# EAGLE board PCB v10 (EAGLE 9.7.0)
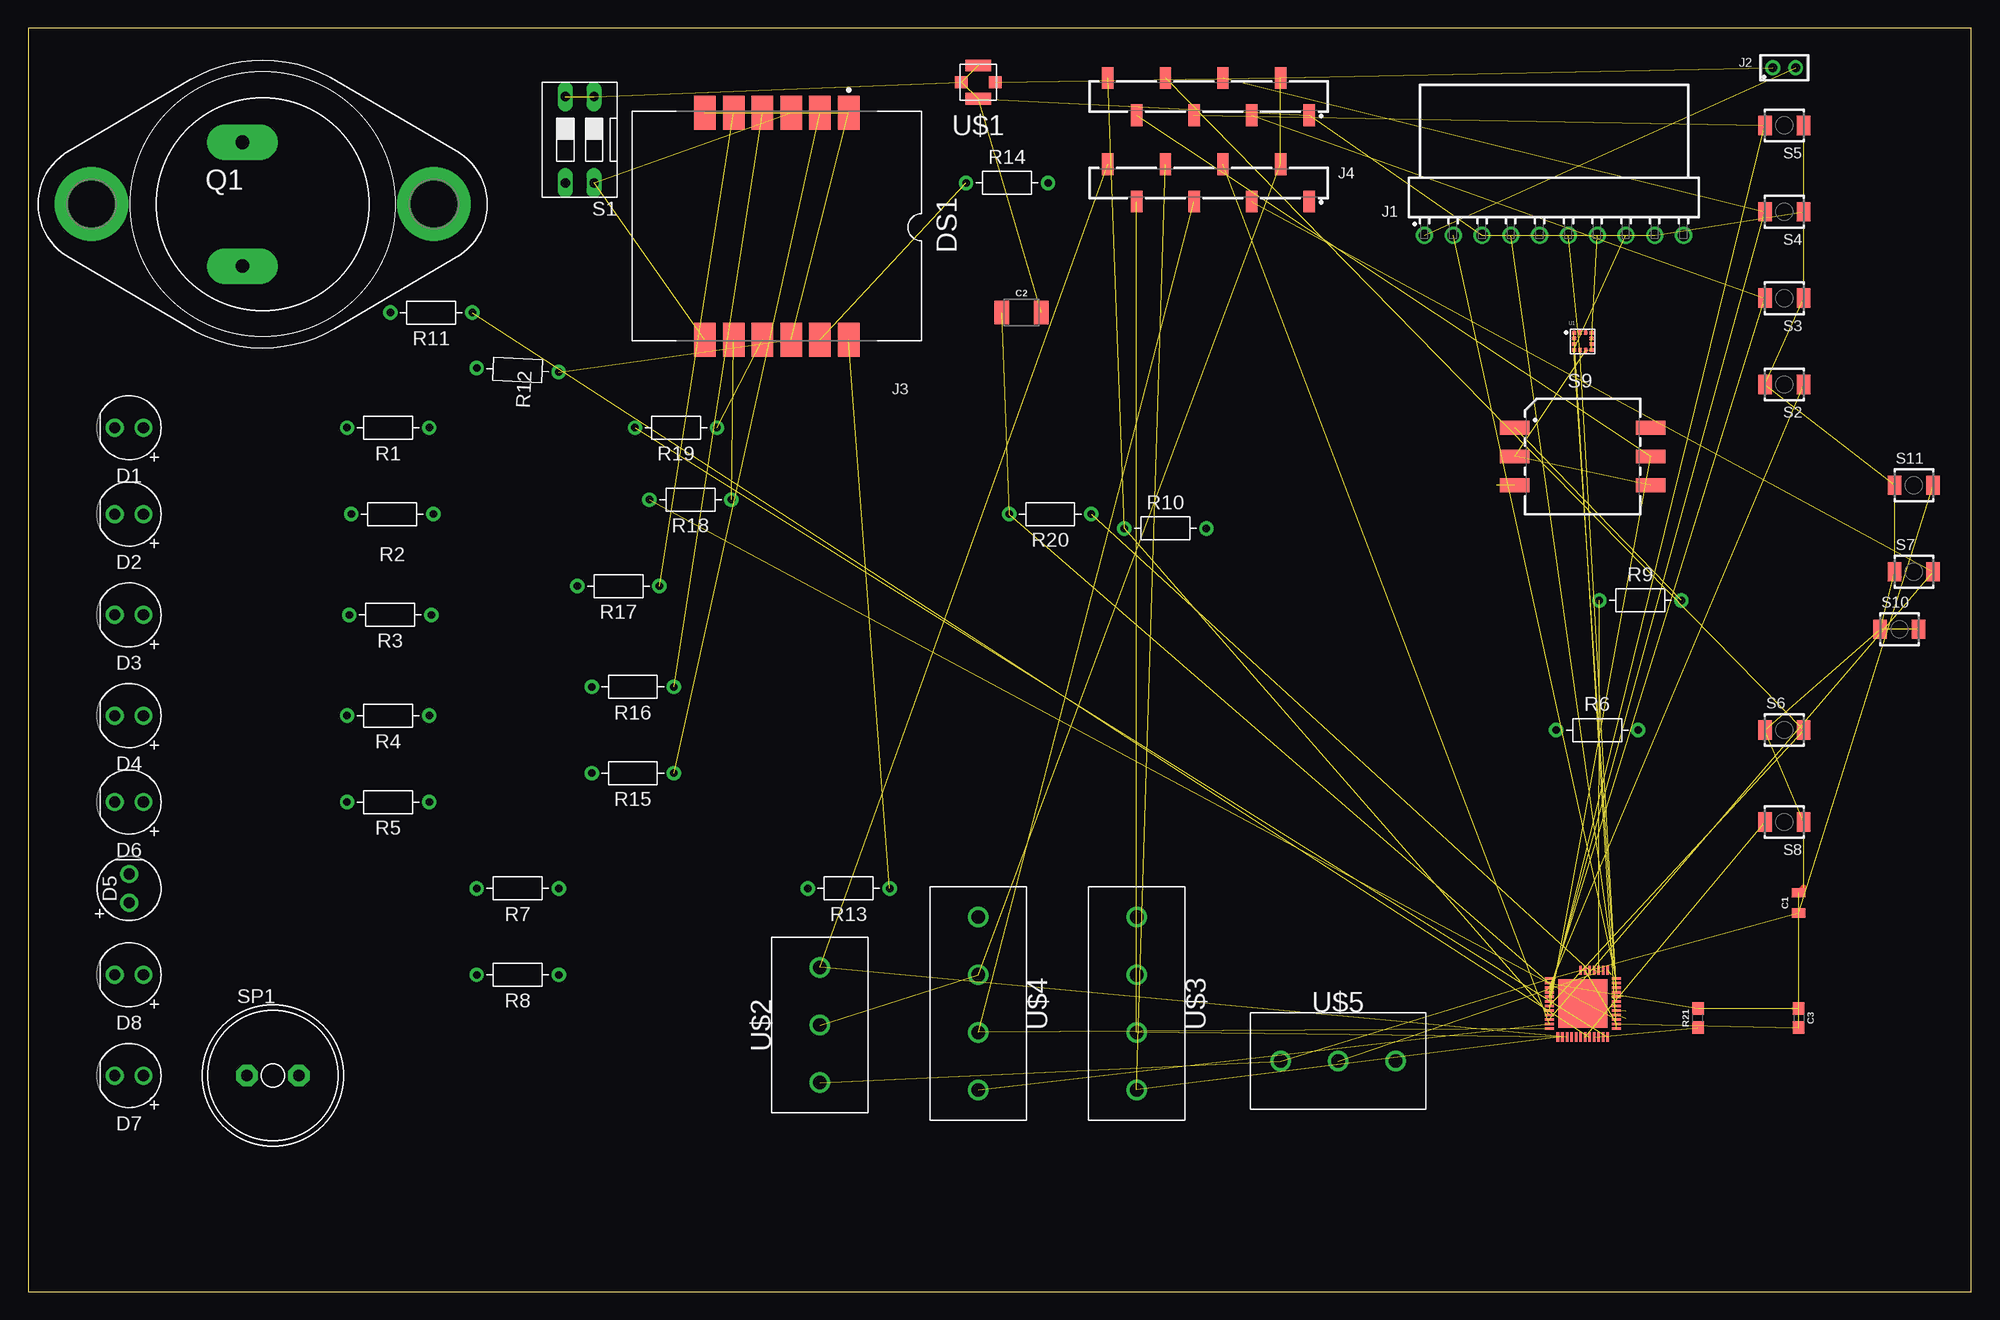
[diagram p0: board, top side]
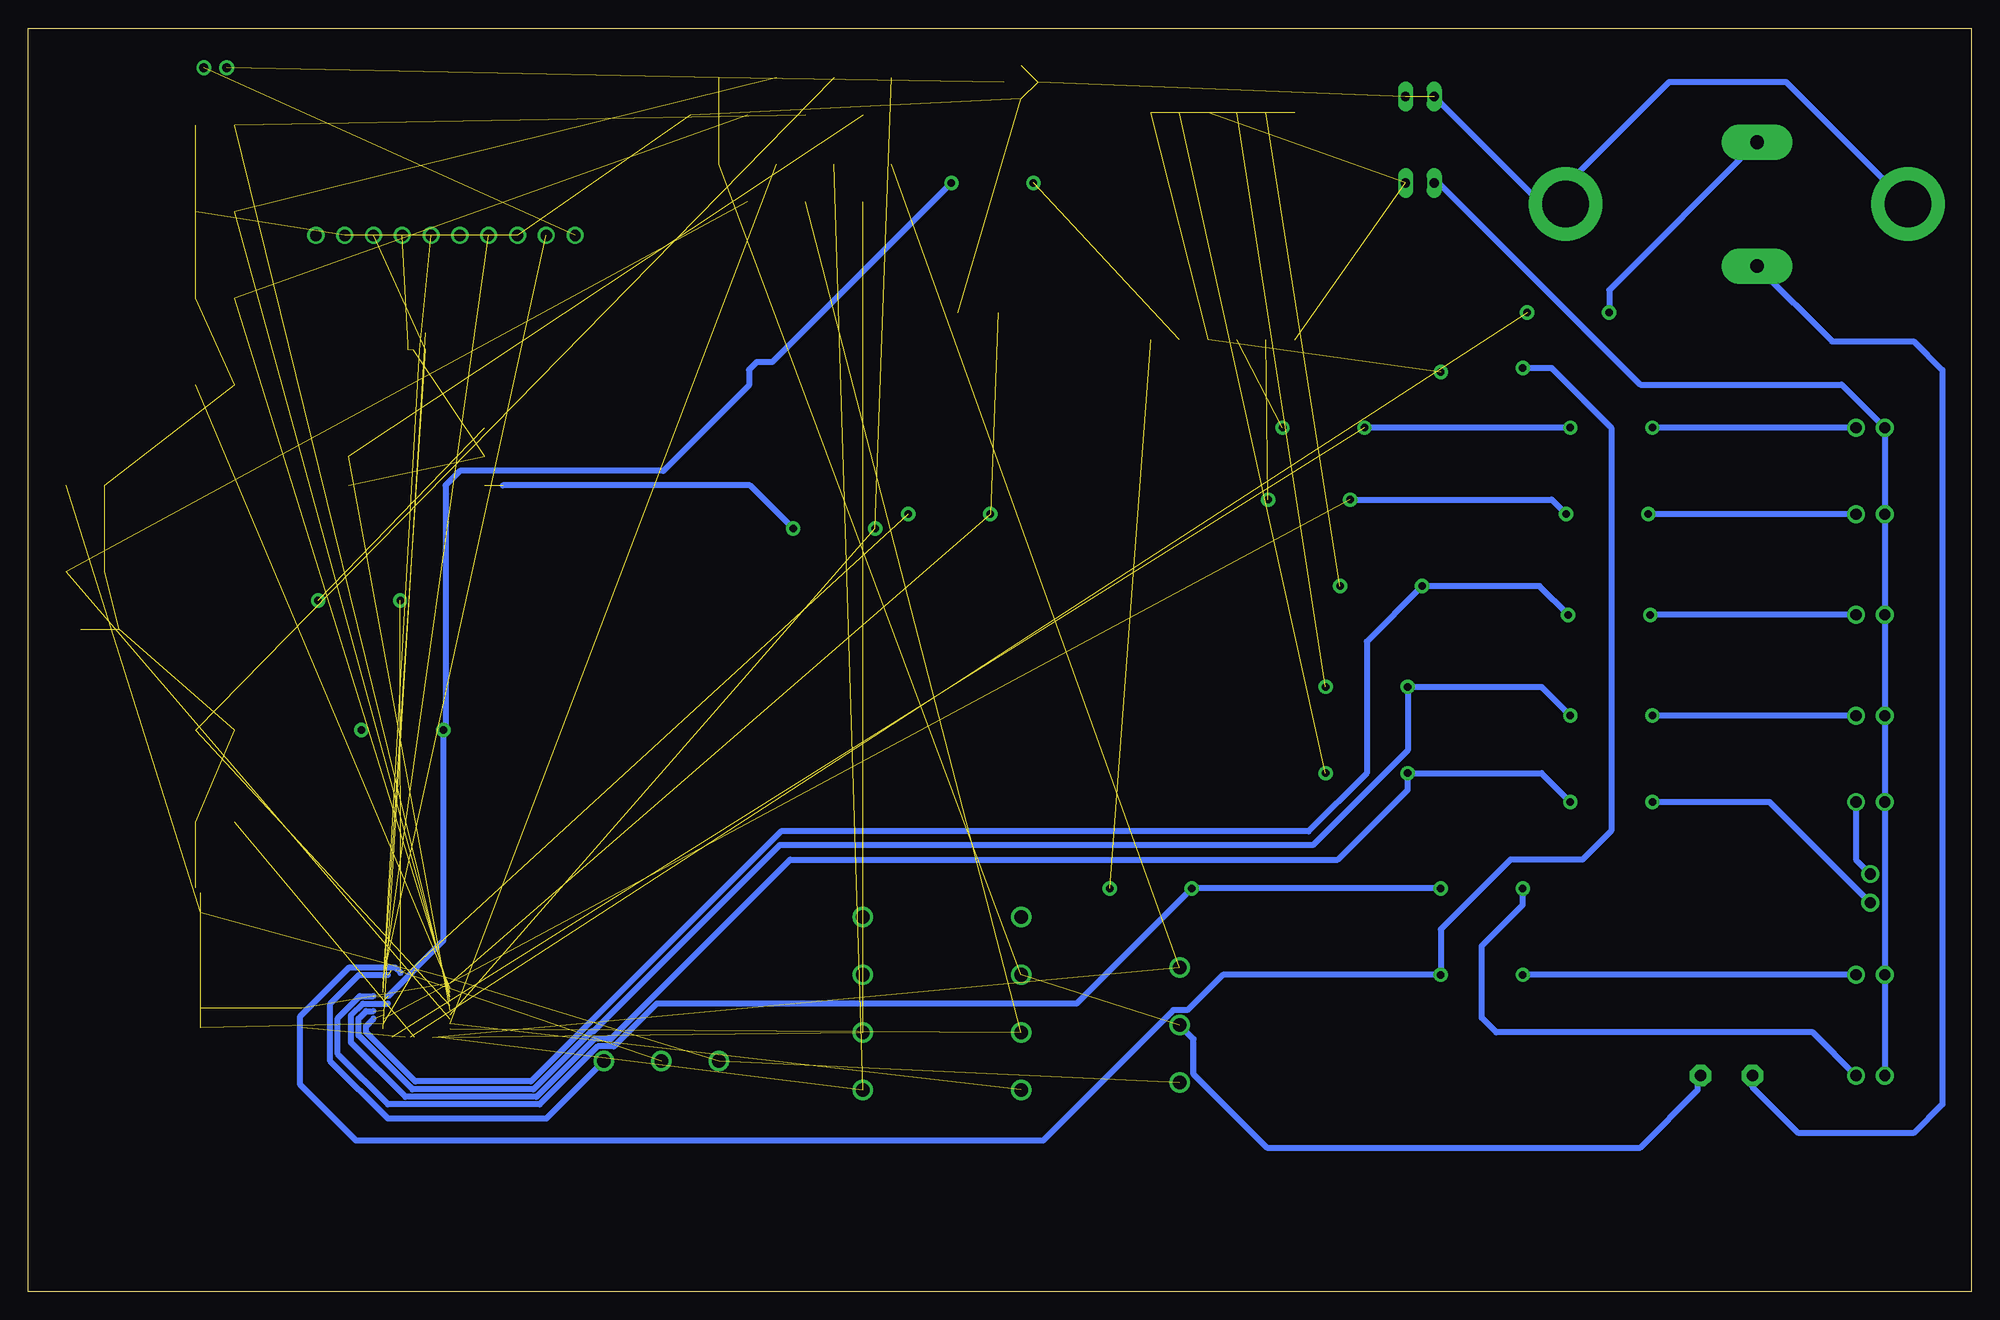
[diagram p1: board, bottom side, seen from below]

Size 171.43 x 111.43 mm. Coordinates in mm from the lower left corner, seen from the top.
Outline: 0,0 171.43,0 171.43,111.43 0,111.43 0,0
Copper layers (1*16): Top / Bottom
Stack-up Default Layer Stack: Top User Defined 0.035mm / Dielectric-1 User Defined 1.5mm / Bottom User Defined 0.035mm
Design rules "default": minimum track width 6mil, minimum drill 0.35mm, track to track 6mil, track to pad 6mil, pad to pad 6mil, via to via 6mil, smd to smd 6mil, copper to edge 40mil, drill to drill 6mil, minimum pad ring 10mil, minimum via ring 8mil, stop-mask expansion 4mil, vias tented up to drill 0mil, thermal gap 10mil

## Footprints (pad centres in the part's own frame; a part is rotated, then mirrored left to right if it is on the bottom)
0805 = smd 0.8 x 1.2: 1 -0.9,0; 2 0.9,0
1210 = smd 1.27 x 2.06: 1 -1.755,0; 2 1.755,0
0603 = smd 1.1 x 1: 1 -0.85,0; 2 0.85,0
LEDRD254W60D565H860B_G = drill 0.981 pad 1.581: 1 -1.27,0; 2 1.27,0
ACDA56-51SURKWA = smd 3 x 1.9: 1 -10,6.35; 2 -10,3.81; 3 -10,1.27; 4 -10,-1.27; 5 -10,-3.81; 6 -10,-6.35; 7 10,-6.35; 8 10,-3.81; 9 10,-1.27; 10 10,1.27; 11 10,3.81; 12 10,6.35
61901019521 = drill 1: 1 11.43,3.35; 2 8.89,3.35; 3 6.35,3.35; 4 3.81,3.35; 5 1.27,3.35; 6 -1.27,3.35; 7 -3.81,3.35; 8 -6.35,3.35; 9 -8.89,3.35; 10 -11.43,3.35
62000211121 = drill 0.8: 1 -1,0; 2 1,0
61000811921 = smd 1 x 1.91: 1 8.89,-1.645; 2 6.35,1.645; 3 3.81,-1.645; 4 1.27,1.645; 5 -1.27,-1.645; 6 -3.81,1.645; 7 -6.35,-1.645; 8 -8.89,1.645
TO3 = drill 1.194 pad 3.15 long: B -1.778,5.461; E -1.778,-5.461 | drill 4.115 pad 6.477: C 15.113,0; C/ -15.113,0
RESAD724W46L381D178B = drill 0.66 pad 1.26: 1 -3.62,0; 2 3.62,0
DS-02 = drill 0.813 long: 1 -1.27,-3.81; 2 1.27,-3.81; 3 1.27,3.81; 4 -1.27,3.81
SWITCH-OMRON_B3U-1000P = smd 1.2 x 1.7: 1 -1.7,0; 2 1.7,0
42852142091X_10POS = smd 2.6 x 1.2: 1 -6,2.54; 2 6,-2.54; 4 -6,-2.54; 8 6,2.54; C1 -6,0; C2 6,0
AL11P = drill 1.016 pad 1.905 octagon: + 2.286,0; - -2.286,0
LGA-12 = smd 0.42 x 0.35: 1 -0.775,0.75; 2 -0.775,0.25; 3 -0.775,-0.25; 4 -0.775,-0.75; 7 0.775,-0.75; 8 0.775,-0.25; 9 0.775,0.25; 10 0.775,0.75 | smd 0.35 x 0.42: 5 -0.25,-0.775; 6 0.25,-0.775; 12 -0.25,0.775 | smd 0.35 x 0.39: 11 0.25,0.775
QFN48-0.4MM = smd 0.8 x 0.23: 1 -2.95,2.2; 2 -2.95,1.8; 3 -2.95,1.4; 4 -2.95,1; 5 -2.95,0.6; 6 -2.95,0.2; 7 -2.95,-0.2; 8 -2.95,-0.6; 9 -2.95,-1; 10 -2.95,-1.4; 11 -2.95,-1.8; 12 -2.95,-2.2; 25 2.95,-2.2; 26 2.95,-1.8; 27 2.95,-1.4; 28 2.95,-1; 29 2.95,-0.6; 30 2.95,-0.2; 31 2.95,0.2; 32 2.95,0.6; 33 2.95,1; 34 2.95,1.4; 35 2.95,1.8; 36 2.95,2.2 | smd 0.23 x 0.8: 13 -2.2,-2.95; 14 -1.8,-2.95; 15 -1.4,-2.95; 16 -1,-2.95; 17 -0.6,-2.95; 18 -0.2,-2.95; 19 0.2,-2.95; 20 0.6,-2.95; 21 1,-2.95; 22 1.4,-2.95; 23 1.8,-2.95; 24 2.2,-2.95; 37 2.2,2.95; 38 1.8,2.95; 39 1.4,2.95; 40 1,2.95; 41 0.6,2.95; 42 0.2,2.95; 43 -0.2,2.95 | smd 4.3 x 4.3: EP 0,0
A-1JB = smd 1.1 x 1.05: 1 1.5,0; 2_1 -1.5,0 | smd 2.25 x 1.05: 2_0 0,1.475; 2_2 0,-1.475
TERMBLK_508-3N = drill 1.2: 1 0,0; 2 5.08,0; 3 10.16,0
TERMBLK_508-4N = drill 1.2: 1 0,0; 2 5.08,0; 3 10.16,0; 4 15.24,0

## Placement (x,y rotation side)
C1  1.0uF  [0805]  156.21,34.29 90 top
C2  22uF  [1210]  87.63,86.36 0 top
C3  0.1uF  [0603]  156.21,24.13 270 top
D1  [LEDRD254W60D565H860B_G]  8.89,76.2 180 top
D2  [LEDRD254W60D565H860B_G]  8.89,68.58 180 top
D3  [LEDRD254W60D565H860B_G]  8.89,59.69 180 top
D4  [LEDRD254W60D565H860B_G]  8.89,50.8 180 top
D5  [LEDRD254W60D565H860B_G]  8.89,35.56 90 top
D6  [LEDRD254W60D565H860B_G]  8.89,43.18 180 top
D7  [LEDRD254W60D565H860B_G]  8.89,19.05 180 top
D8  [LEDRD254W60D565H860B_G]  8.89,27.94 180 top
DS1  ACDA56-51SUR  [ACDA56-51SURKWA]  66.04,93.98 270 top
J1  61901019521  [61901019521]  134.62,96.52 180 top
J2  62000211121  [62000211121]  154.94,107.95 0 top
J3  61000811921  [61000811921]  104.14,105.41 0 top
J4  61000811921  [61000811921]  104.14,97.79 0 top
Q1  BU205  [TO3]  20.68,95.92 0 top
R1  1K  [RESAD724W46L381D178B]  31.75,76.2 180 top
R2  1K  [RESAD724W46L381D178B]  32.11,68.58 180 top
R3  1K  [RESAD724W46L381D178B]  31.94,59.69 180 top
R4  1K  [RESAD724W46L381D178B]  31.75,50.8 180 top
R5  1K  [RESAD724W46L381D178B]  31.75,43.18 180 top
R6  1K  [RESAD724W46L381D178B]  138.43,49.53 0 top
R7  1K  [RESAD724W46L381D178B]  43.18,35.56 180 top
R8  1K  [RESAD724W46L381D178B]  43.18,27.94 180 top
R9  1K  [RESAD724W46L381D178B]  142.24,60.96 0 top
R10  1K  [RESAD724W46L381D178B]  100.33,67.31 0 top
R11  1K  [RESAD724W46L381D178B]  35.56,86.36 180 top
R12  1K  [RESAD724W46L381D178B]  43.18,81.28 177.2 top
R13  1K  [RESAD724W46L381D178B]  72.39,35.56 180 top
R14  1K  [RESAD724W46L381D178B]  86.36,97.79 0 top
R15  1K  [RESAD724W46L381D178B]  53.34,45.72 180 top
R16  1K  [RESAD724W46L381D178B]  53.34,53.34 180 top
R17  1K  [RESAD724W46L381D178B]  52.07,62.23 180 top
R18  1K  [RESAD724W46L381D178B]  58.42,69.85 180 top
R19  1K  [RESAD724W46L381D178B]  57.15,76.2 180 top
R20  10k  [RESAD724W46L381D178B]  90.17,68.58 180 top
R21  10k  [0603]  147.32,24.13 90 top
S1  DS02E  [DS-02]  48.65,101.6 180 top
S2  SWITCH-OMRON_B3U-1000P  [SWITCH-OMRON_B3U-1000P]  154.94,80.01 180 top
S3  SWITCH-OMRON_B3U-1000P  [SWITCH-OMRON_B3U-1000P]  154.94,87.63 180 top
S4  SWITCH-OMRON_B3U-1000P  [SWITCH-OMRON_B3U-1000P]  154.94,95.25 180 top
S5  SWITCH-OMRON_B3U-1000P  [SWITCH-OMRON_B3U-1000P]  154.94,102.87 180 top
S6  SWITCH-OMRON_B3U-1000P  [SWITCH-OMRON_B3U-1000P]  154.94,49.53 0 top
S7  SWITCH-OMRON_B3U-1000P  [SWITCH-OMRON_B3U-1000P]  166.37,63.5 0 top
S8  SWITCH-OMRON_B3U-1000P  [SWITCH-OMRON_B3U-1000P]  154.94,41.42 180 top
S9  [42852142091X_10POS]  137.16,73.66 0 top
S10  SWITCH-OMRON_B3U-1000P  [SWITCH-OMRON_B3U-1000P]  165.1,58.42 0 top
S11  SWITCH-OMRON_B3U-1000P  [SWITCH-OMRON_B3U-1000P]  166.37,71.12 0 top
SP1  AL11P  [AL11P]  21.59,19.05 0 top
U1  LIS2HH12TR  [LGA-12]  137.16,83.82 0 top
U2  ESP32  [QFN48-0.4MM]  137.16,25.4 0 top
U$1  A-1JB  [A-1JB]  83.82,106.68 0 top
U$2  2828XX-3282837-3  [TERMBLK_508-3N]  69.85,28.59 270 top
U$3  2828XX-4282837-4  [TERMBLK_508-4N]  97.79,17.78 90 top
U$4  2828XX-4282837-4  [TERMBLK_508-4N]  83.82,17.78 90 top
U$5  2828XX-3282837-3  [TERMBLK_508-3N]  120.65,20.32 180 top

## Library data of the parts
C1 = SparkFun-Capacitors; PROD_ID: CAP-08064; SPICEPREFIX: C
C2 = SparkFun-Capacitors; SPICEPREFIX: C
C3 = SparkFun-Capacitors; PROD_ID: CAP-08390
D1-D8 = Library
DS1 = Display_LED; CATEGORY: DISPLAY; COLOR: Hyper Red (AlGaInP); CONFIGURATION: Common Anode; DESCRIPTION: The Hyper Red source color devices are made with AlGaInP on GaAs substrate Light Emitting Diode; DIGIT: Dual Digit; MANUFACTURER: Kingbright; MPN: ACDA56-51SURKWA; OPERATING_TEMP: -40°C to +85 °C; PART_STATUS: Active; ROHS_COMPLIANT: COMPLIANT; SERIES: -; SUB-CATEGORY: LED; THERMALLOSS: 0.075 W; TYPE: 7-Segment
J1 = Wurth_Connectors_WR-WTB; CONTACT-RESISTANCE: 20mOhm; DATASHEET-URL: https://www.we-online.com/redexpert/spec/61901019521?ae; GENDER: Male; L: 25.4mm; MOUNT: THT; PACKAGING: Bag; PART-NUMBER: 61901019521; PCB-CABLE-PANEL: PCB; PINS: 10; PITCH: 2.54mm; TYPE: Right Angled Top Locking; WORKING-VOLTAGE: 250V(AC)
J2 = Wurth_Connectors_WR-PHD; DATASHEET-URL: https://www.we-online.com/redexpert/spec/62000211121?ae; GENDER: Pin Header; IR: 2A; MOUNT: THT; PACKAGING: Bag; PART-NUMBER: 62000211121; PINS: 2; PITCH: 2.00mm; ROWS: Single; TYPE: Straight
J3 J4 = Wurth_Connectors_WR-PHD; DATASHEET-URL: https://www.we-online.com/redexpert/spec/61000811921?ae; GENDER: Socket Header; IR: 3A; MOUNT: SMT; PACKAGING: Tube; PART-NUMBER: 61000811921; PINS: 8; PITCH: 2.54mm; ROWS: Single; TYPE: Straight Type 1
Q1 = transistor-npn
R1-R19 = Resistor; CATEGORY: Resistor; SUB-CATEGORY: Fixed
R20 = Resistor; CATEGORY: Resistor; SPICEPREFIX: R; SUB-CATEGORY: Fixed
R21 = SparkFun-Resistors; PROD_ID: RES-00824; SPICEPREFIX: R
S1 = Switch; CATEGORY: SWITCH; TYPE: SPST
S2-S8 S10 S11 = 52101-101-REV-A_v16
S9 = Wurth_Switch_WS-ROSV; DATASHEET-URL: https://www.we-online.com/catalog/datasheet/428521420911.pdf; NUMBER-OF-POSITION: 10; PART-NUMBER: 428521420911; QTY: 600
SP1 = buzzer; OC_FARNELL: unknown; OC_NEWARK: unknown
U1 = Sensor; CREATED_BY: PCBLayout.com; DIGIKEY_PN: 497-15069-2-ND; MANUFACTURER: STMicroelectronics; MPN: LIS2HH12TR; PACKAGE: LGA-12
U2 = Biblioteca ESP32-S2; PROD_ID: IC-13338; SPICEPREFIX: X
U$1 = Connector; CATEGORY: Connector; DESCRIPTION: U.FL (UMCC), AMC Connector Jack, Male Pin 50Ohm Surface Mount Solder; MANUFACTURER: Amphenol RF; MPN: A-1JB; OPERATING_TEMPERATURE: 40°C TO +90°C; PART_STATUS: Active; ROHS_COMPLIANCE: RoHS Compliant; SERIES: AMC; TYPE: Coaxial Connector (RF)
U$2 U$5 = Connector; CATEGORY: Connector; DESCRIPTION: TERM BLK 3P SIDE ENT 5.08mm PCB; MANUFACTURER: TE Connectivity; MPN: 282837-3; OPERATING_TEMPERATURE: -40°C to +105°C; PART_STATUS: Active; ROHS_COMPLIANCE: RoHS Compliant; SERIES: 282837; SUBCATEGORY: Terminal Block; TYPE: Side Wire Entry
U$3 U$4 = Connector; CATEGORY: Connector; DESCRIPTION: TERM BLK 4P SIDE ENT 5.08mm PCB; MANUFACTURER: TE Connectivity; MPN: 282837-4; OPERATING_TEMPERATURE: 40°C to +105°C; PART_STATUS: Active; ROHS_COMPLIANCE: RoHS Compliant; SERIES: 283737; SUBCATEGORY: Terminal Block; TYPE: Side Wire Entry

## Nets
+3V3: C2.1 C3.1 R20.2 R21.2 U2.2
GND: C1.2 C2.2 C3.2 J1.3 J1.5 J1.7 J1.9 J3.1 Q1.C Q1.C/ S1.1 S1.2 S2.2 S3.1 S4.1 S5.1 S6.1 S7.1 S8.1 S9.2 S9.C1 S10.1 S10.2 S11.1 U1.6 U1.7 U1.8 U2.1 U2.26 U2.42 U2.43 U$1.2_0 U$1.2_1 U$1.2_2 U$2.3 U$5.3
GPIO0: S2.1 U2.3
GPIO1: J3.3 S3.2 U2.4
GPIO2: J3.4 S4.2 U2.5
GPIO3: J3.5 S5.2 U2.6
GPIO4: J3.6 S6.2 U2.7
GPIO5: J3.7 S9.C2 U2.8
GPIO6: J3.8 R10.1 U2.9
GPIO7: J4.3 S7.2 U2.10
GPIO8: J4.4 U2.11 U$4.1
GPIO9: J4.5 U2.12 U$4.2
GPIO10: J4.6 U2.13 U$3.1
GPIO11: J4.7 U2.14 U$3.2
GPIO12: J4.8 U2.15 U$2.1
GPIO13: U2.16
GPIO14: U2.17
GPIO15: U2.18
GPIO16: S8.2 U2.19
GPIO17: R11.1 U2.20
GPIO18: R21.1 U2.21
GPIO21: R1.1 R19.2 U2.24
GPIO26: U1.1 U2.25
GPIO33: R2.1 R18.2 U2.27
GPIO34: R3.1 R17.2 U2.28
GPIO35: R4.1 R16.2 U2.29
GPIO36: R5.1 R15.2 U2.30
GPIO37: R6.1 R14.2 U2.31
GPIO38: R7.1 R13.2 U2.32
GPIO39: J1.8 U1.4 U2.33
GPIO40: J1.6 U1.5 U2.34
GPIO41: J1.4 U2.35
GPIO42: J1.2 U2.36
GPIO43: U2.37 U$5.1
GPIO44: U2.38 U$5.2
GPIO45: R9.1 U2.39
GPIO46: R8.1 R12.2 U2.40
N$1: Q1.E SP1.-
N$2: DS1.3 DS1.7 S1.4
N$3: D1.1 R1.2
N$4: D2.1 R2.2
N$5: D3.1 R3.2
N$6: D4.1 R4.2
N$7: D5.1 R5.2
N$8: DS1.9 R19.1
N$9: C1.1 R20.1 S11.2 U2.41
N$10: R6.2
N$11: DS1.8 R18.1
N$12: D5.2 D6.1
N$13: DS1.5 R17.1
N$14: DS1.4 R16.1
N$15: DS1.2 R15.1
N$17: DS1.11 R14.1
N$18: DS1.12 R13.1
N$19: R9.2 S9.1
N$20: R10.2 S9.4
N$21: DS1.1 DS1.6 DS1.10 R12.1
N$24: Q1.B R11.2
N$33: J1.1 J2.2
N$38: D7.1 R7.2
N$39: D8.1 R8.2
N$55: D1.2 D2.2 D3.2 D4.2 D6.2 D7.2 D8.2 S1.3
USB_D+: U2.23
USB_D-: U2.22
VCC: J2.1 J3.2 J4.2 SP1.+ U$1.1 U$2.2 U$4.3
VDD: U1.9
VDD_IO: U1.10

## Tracks (layer width: path | path; a pad name or v marks a point on that pad's centre or on a via)
+3V3  (4 unrouted)
GND  (33 unrouted)
  Top 0.508: 156.64,35.62 C1.2
  Bottom 0.508: S1.2 37.89,95.92 Q1.C | Q1.C/ 16.32,106.68 26.67,106.68 35.56,97.79 35.56,95.25
GPIO0  (1 unrouted)
GPIO1  (2 unrouted)
GPIO2  (2 unrouted)
GPIO3  (2 unrouted)
GPIO4  (2 unrouted)
GPIO5  (2 unrouted)
GPIO6  (2 unrouted)
GPIO7  (2 unrouted)
GPIO8  (2 unrouted)
GPIO9  (2 unrouted)
GPIO10  (2 unrouted)
GPIO11  (2 unrouted)
GPIO12  (2 unrouted)
GPIO16  (1 unrouted)
GPIO17  (1 unrouted)
GPIO18  (1 unrouted)
GPIO21  (1 unrouted)
  Bottom 0.508: R1.1 R19.2
GPIO26  (1 unrouted)
GPIO33  (1 unrouted)
  Bottom 0.508: R18.2 37,69.85 R2.1
GPIO34  (1 unrouted)
  Bottom 0.508: R3.1 38.1,62.23 R17.2 53.34,57.34 53.34,45.72 58.47,40.59 105.03,40.59 127.09,18.53 137.29,18.53 141.63,22.87 141.63,23.42 140.97,24.08
GPIO35  (1 unrouted)
  Bottom 0.508: R4.1 37.91,53.34 R16.2 49.72,47.73 58.08,39.37 105.14,39.37 121.56,22.95 121.74,22.95 126.86,17.83 137.52,17.83 142.29,22.6 142.29,24.08 141.63,24.74 140.97,24.74
GPIO36  (1 unrouted)
  Bottom 0.508: R5.1 37.91,45.72 R15.2 49.72,44.26 55.88,38.1 104.21,38.1 120.02,22.29 121.47,22.29 126.58,17.17 138.16,17.17 142.95,21.96 142.95,24.35 141.9,25.4 139.7,25.4
GPIO37  (1 unrouted)
  Bottom 0.508: 139.7,26.06 134.81,30.95 R6.1 134.62,49.72 134.62,71.12 133.35,72.39 115.38,72.39 107.84,79.93 107.84,81.3 107.16,81.98 105.79,81.98 R14.2
GPIO38  (1 unrouted)
  Bottom 0.508: R7.1 R13.2 78.93,25.4 115.97,25.4 119.75,21.63 121.19,21.63 126.31,16.51 139.7,16.51 144.12,20.93 144.12,24.12 142.18,26.06 140.97,26.06
GPIO39  (2 unrouted)
GPIO40  (2 unrouted)
GPIO41  (1 unrouted)
GPIO42  (1 unrouted)
GPIO43  (1 unrouted)
  Bottom 0.508: U$5.1 125.73,15.24 139.7,15.24 144.78,20.32 144.78,25.4 142.24,27.94 139.7,27.94
GPIO44  (1 unrouted)
GPIO45  (1 unrouted)
GPIO46  (1 unrouted)
  Bottom 0.508: R12.2 37.01,81.46 31.75,76.2 31.75,40.64 34.29,38.1 40.64,38.1 46.8,31.94 R8.1 66.04,27.94 69.17,24.81 70.39,24.81 81.89,13.31 142.51,13.31 147.42,18.22 147.42,24.29 143.11,28.6 139.09,28.6 138.59,28.1
N$1
  Bottom 0.508: Q1.E 12.26,83.82 5.08,83.82 2.54,81.28 2.54,16.51 5.08,13.97 15.24,13.97 19.3,18.03 SP1.-
N$2  (2 unrouted)
N$3
  Bottom 0.508: D1.1 R1.2
N$4
  Bottom 0.508: D2.1 R2.2
N$5
  Bottom 0.508: D3.1 R3.2
N$6
  Bottom 0.508: D4.1 R4.2
N$7
  Bottom 0.508: R5.2 17.78,43.18 D5.1
N$8  (1 unrouted)
N$9  (3 unrouted)
N$11  (1 unrouted)
N$12
  Bottom 0.508: D6.1 10.16,38.1 D5.2
N$13  (1 unrouted)
N$14  (1 unrouted)
N$15  (1 unrouted)
N$17  (1 unrouted)
N$18  (1 unrouted)
N$19  (1 unrouted)
N$20  (1 unrouted)
  Bottom 0.508: R10.2 107.76,71.12 129.54,71.12
N$21  (3 unrouted)
N$24
  Bottom 0.508: Q1.B 31.94,88.34 R11.2
N$33  (1 unrouted)
N$38
  Bottom 0.508: D7.1 13.97,22.86 41.91,22.86 43.18,24.13 43.18,30.48 39.56,34.1 R7.2
N$39
  Bottom 0.508: D8.1 R8.2
N$55
  Bottom 0.508: D7.2 D8.2 D6.2 D4.2 D3.2 D2.2 D1.2 11.43,80.01 29.21,80.01 35.56,86.36 46.99,97.79 S1.3
VCC  (5 unrouted)
  Bottom 0.508: SP1.+ 24.13,19.05 24.13,17.78 29.21,12.7 62.16,12.7 68.62,19.16 68.62,22.27 U$2.2